# EAGLE board MODULO_LEDS (EAGLE 7.5.0)
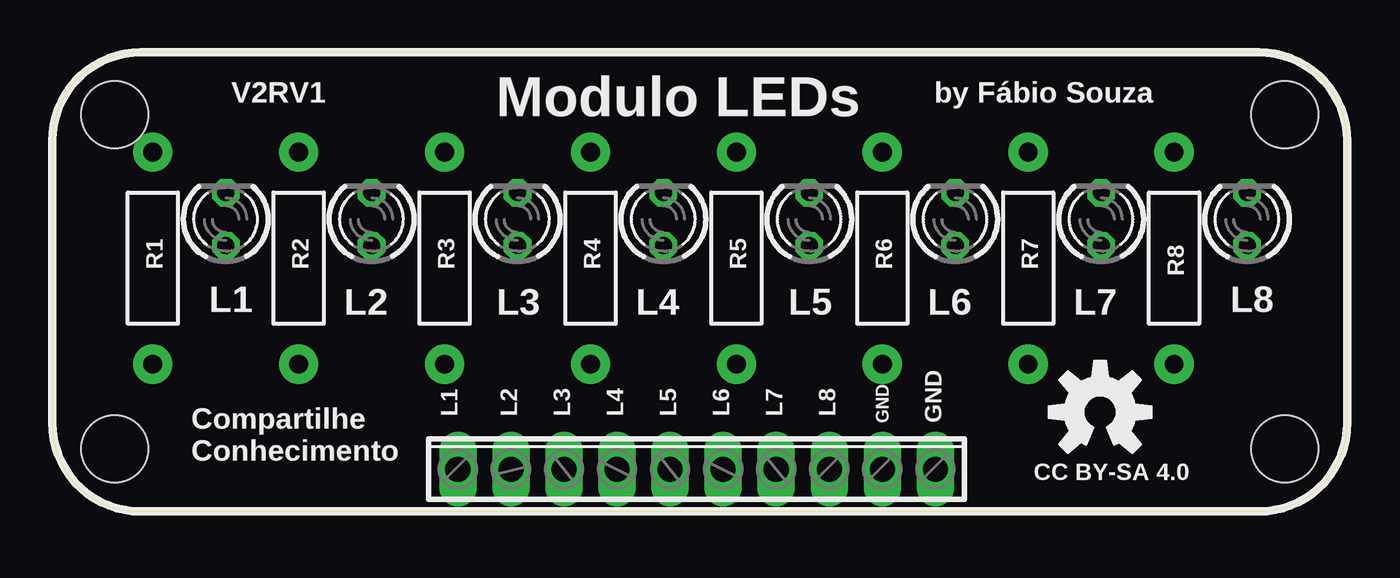
[diagram p0: board, top side]
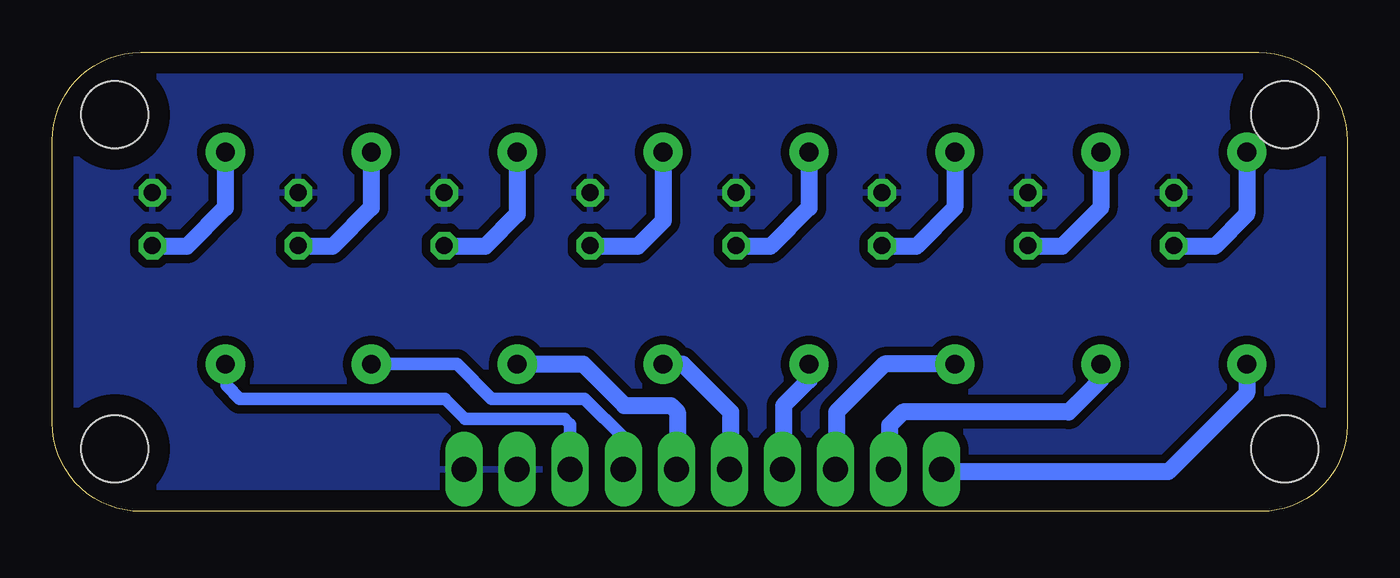
[diagram p1: board, bottom side, seen from below]

Size 62 x 22 mm. Coordinates in mm from the lower left corner, seen from the top.
Outline: 62,4.24 62,17.76 arc90 57.76,22 4.24,22 arc90 0,17.76 0,4.12 arc90 4.12,0 57.76,0 arc90 62,4.24
Copper layers (1*16): Top 0.035mm / dielectric 1.5mm / Bottom 0.035mm
Design rules "default": minimum track width 10mil, minimum drill 24mil, track to track 8mil, track to pad 8mil, pad to pad 8mil, via to via 8mil, smd to smd 8mil, copper to edge 40mil, drill to drill 8mil, minimum pad ring 10mil, minimum via ring 8mil, stop-mask expansion 4mil, vias tented up to drill 0mil, thermal gap 10mil
Holes 3.2 mm at 59,3 59,19 3,19 3,3

## Footprints (pad centres in the part's own frame; a part is rotated, then mirrored left to right if it is on the bottom)
LED3MM = drill 0.813 octagon: A -1.27,0; K 1.27,0
AXIAL-0.4 = drill 0.9 pad 1.88: P$1 -5.08,0; P$2 5.08,0
10POL254 = drill 1.2 long: 1 -11.43,0; 2 -8.89,0; 3 -6.35,0; 4 -3.81,0; 5 -1.27,0; 6 1.27,0; 7 3.81,0; 8 6.35,0; 9 8.89,0; 10 11.43,0

## Placement (x,y rotation side)
L1  [LED3MM]  8.31,14 90 top
L2  [LED3MM]  15.29,14 90 top
L3  [LED3MM]  22.28,14 90 top
L4  [LED3MM]  29.26,14 90 top
L5  [LED3MM]  36.25,14 90 top
L6  [LED3MM]  43.23,14 90 top
L7  [LED3MM]  50.22,14 90 top
L8  [LED3MM]  57.2,14 90 top
LOGO1  OSHW-LOGOM  [OSHW-LOGO-M]  50.16,4.76 0 top
R1  330R  [AXIAL-0.4]  4.82,12.14 270 top
R2  330R  [AXIAL-0.4]  11.8,12.14 270 top
R3  330R  [AXIAL-0.4]  18.79,12.14 270 top
R4  330R  [AXIAL-0.4]  25.77,12.14 270 top
R5  330R  [AXIAL-0.4]  32.76,12.14 270 top
R6  330R  [AXIAL-0.4]  39.74,12.14 270 top
R7  330R  [AXIAL-0.4]  46.73,12.14 270 top
R8  330R  [AXIAL-0.4]  53.71,12.14 270 top
X4  [10POL254]  30.85,2.02 0 top

## Library data of the parts
L1-L8 = led
LOGO1 = SparkFun-Aesthetics
R1-R8 = SparkFun
X4 = con-phoenix-254; OC_FARNELL: unknown; OC_NEWARK: unknown

## Nets
N$5: L1.A R1.P$1
N$6: L2.A R2.P$1
N$7: L3.A R3.P$1
N$8: L4.A R4.P$1
N$11: L1.K L2.K L3.K L4.K L5.K L6.K L7.K L8.K X4.9 X4.10
N$12: L5.A R5.P$1
N$13: L6.A R6.P$1
N$14: L7.A R7.P$1
N$15: L8.A R8.P$1
N$18: R1.P$2 X4.1
N$20: R2.P$2 X4.2
N$21: R3.P$2 X4.3
N$22: R4.P$2 X4.4
N$23: R5.P$2 X4.5
N$24: R6.P$2 X4.6
N$25: R7.P$2 X4.7
N$26: R8.P$2 X4.8

## Tracks (layer width: path | path; a pad name or v marks a point on that pad's centre or on a via)
N$5
  Bottom 0.813: R1.P$1 4.82,14.23 6.35,12.7 8.28,12.7 L1.A
N$6
  Bottom 0.813: R2.P$1 11.8,14.55 13.65,12.7 15.26,12.7 L2.A
N$7
  Bottom 0.813: R3.P$1 18.79,14.55 20.64,12.7 22.25,12.7 L3.A
N$8
  Bottom 0.813: R4.P$1 25.77,14.55 27.62,12.7 29.23,12.7 L4.A
N$11
  pour Bottom (isolate 0.406): 62,0.44 62,16.17 arc90 56.17,22 0.37,22 0.37,0.12
N$12
  Bottom 0.813: R5.P$1 32.76,13.92 33.97,12.7 36.22,12.7 L5.A
N$13
  Bottom 0.813: R6.P$1 39.74,14.23 41.27,12.7 43.2,12.7 L6.A
N$14
  Bottom 0.813: R7.P$1 46.73,14.55 48.58,12.7 50.19,12.7 L7.A
N$15
  Bottom 0.813: R8.P$1 53.71,14.55 55.56,12.7 57.17,12.7 L8.A
N$18
  Bottom 0.813: R1.P$2 4.82,5.66 8.57,1.91 19.3,1.91 X4.1
N$20
  Bottom 0.813: R2.P$2 11.8,6.3 13.34,4.76 21.27,4.76 21.91,4.13 21.91,2.08 X4.2
N$21
  Bottom 0.813: R3.P$2 22.15,7.06 24.45,4.76 24.45,2.08 X4.3
N$22
  Bottom 0.813: R4.P$2 25.77,6.3 26.99,5.08 26.99,2.08 X4.4
N$23
  Bottom 0.813: R5.P$2 31.82,7.06 29.53,4.76 29.53,2.08 X4.5
N$24
  Bottom 0.813: R6.P$2 36.59,7.06 34.61,5.08 32.38,5.08 32.07,4.76 32.07,2.08 X4.6
N$25
  Bottom 0.61: R7.P$2 42.62,7.06 40.96,5.4 36.51,5.4 34.61,3.49 34.61,2.08 X4.7
N$26
  Bottom 0.61: X4.8 37.2,4.18 37.47,4.45 42.23,4.45 43.18,5.4 53.02,5.4 53.66,6.03 53.66,7 R8.P$2

## Text on the board
tPlace: V2RV1 | by Fábio Souza | Modulo LEDs | L1 | L2 | L3 | L4 | L5 | L6 | L7 | L8 | GND | GND | Compartilhe / Conhecimento | CC BY-SA 4.0